# EAGLE board ampli (EAGLE 8.5.0)
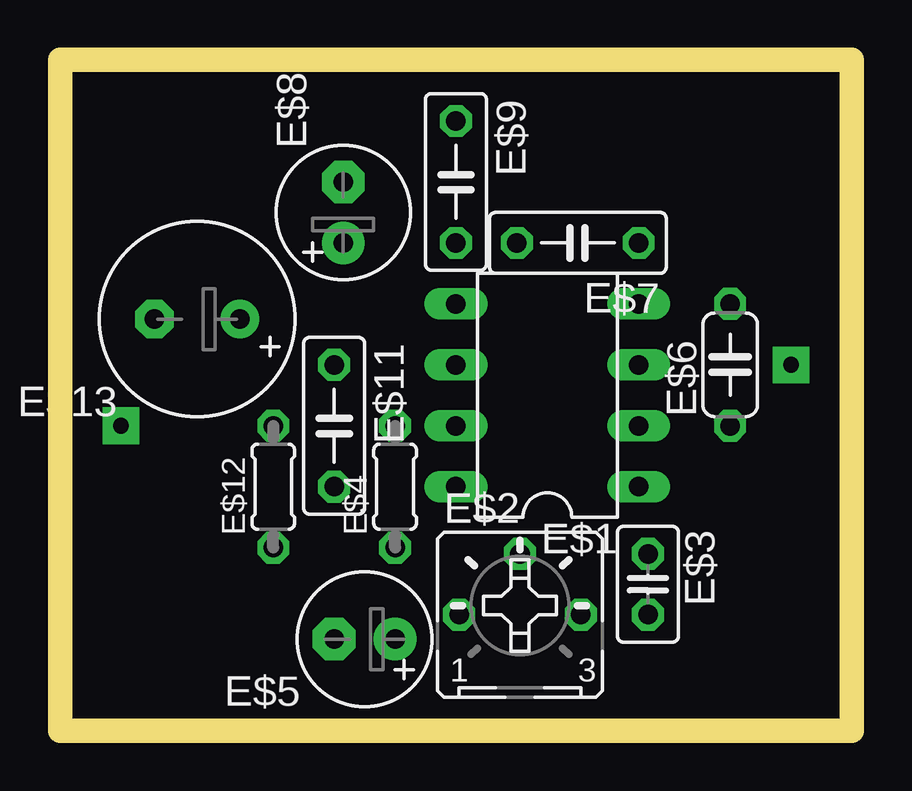
[diagram p0: board, top side]
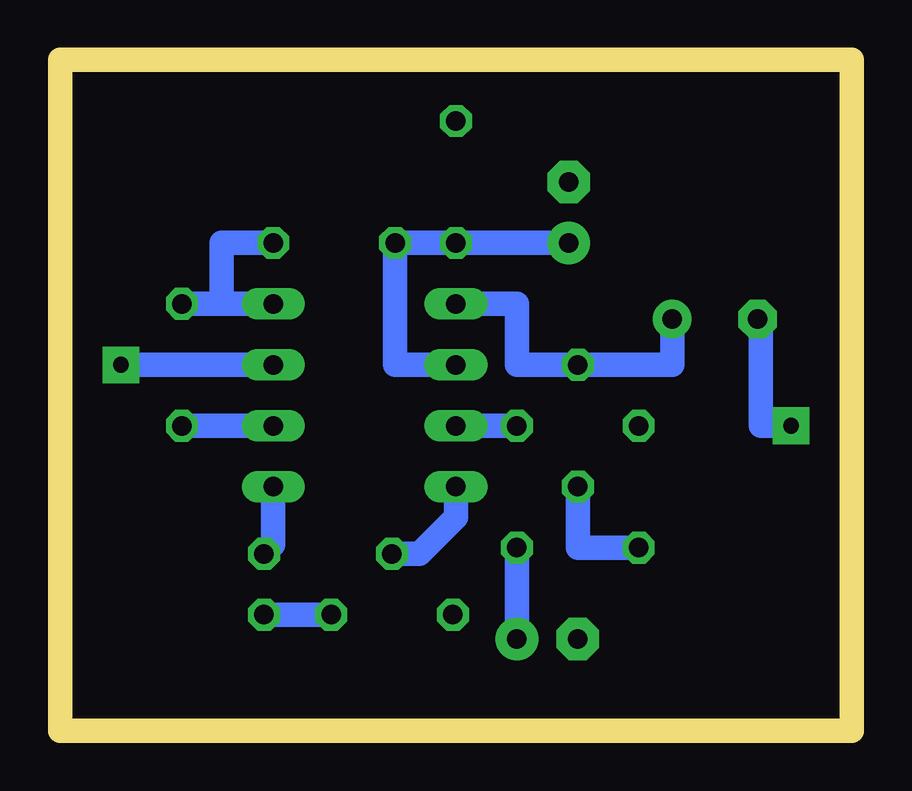
[diagram p1: board, bottom side, seen from below]

Size 33.02 x 27.94 mm. Coordinates in mm from the lower left corner, seen from the top.
Outline: 0,27.94 0,0 33.02,0 33.02,27.94 0,27.94
Copper layers (1*16): Top 0.035mm / dielectric 1.5mm / Bottom 0.035mm
Design rules "default": minimum track width 6mil, minimum drill 0.35mm, track to track 6mil, track to pad 6mil, pad to pad 6mil, via to via 6mil, smd to smd 6mil, copper to edge 40mil, drill to drill 6mil, minimum pad ring 10mil, minimum via ring 8mil, stop-mask expansion 4mil, vias tented up to drill 0mil, thermal gap 10mil

## Footprints (pad centres in the part's own frame; a part is rotated, then mirrored left to right if it is on the bottom)
DIL08 = drill 0.813 long: 1 -3.81,-3.81; 2 -1.27,-3.81; 3 1.27,-3.81; 4 3.81,-3.81; 5 3.81,3.81; 6 1.27,3.81; 7 -1.27,3.81; 8 -3.81,3.81
B25P = drill 0.813 octagon: A -2.54,0; E 2.54,0; S 0,2.54
C025-025X050 = drill 0.813 octagon: 1 -1.27,0; 2 1.27,0
0204/5 = drill 0.813 octagon: 1 -2.54,0; 2 2.54,0
E2,5-6 = drill 0.813 pad 1.778: + -1.27,0 | drill 0.813 pad 1.778 octagon: - 1.27,0
C050-024X044 = drill 0.813 octagon: 1 -2.54,0; 2 2.54,0
C050-025X075 = drill 0.813 octagon: 1 -2.54,0; 2 2.54,0
E3,5-8 = drill 0.813 pad 1.6: + -1.778,0 | drill 0.813 pad 1.6 octagon: - 1.778,0

## Placement (x,y rotation side)
E$1  [DIL08]  20.32,13.97 90 top
E$2  [B25P]  19.18,4.83 0 top
E$3  [C025-025X050]  24.51,6.1 270 top
E$4  [0204/5]  13.97,10.16 90 top
E$5  [E2,5-6]  12.7,3.81 180 top
E$6  [C050-024X044]  27.94,15.24 90 top
E$7  [C050-025X075]  21.59,20.32 180 top
E$8  [E2,5-6]  11.81,21.59 90 top
E$9  [C050-025X075]  16.51,22.86 270 top
E$11  [C050-025X075]  11.43,12.7 270 top
E$12  [0204/5]  8.89,10.16 90 top
E$13  [E3,5-8]  5.71,17.14 180 top

## Library data of the parts
E$1 = 40xx
E$2 = pot
E$3 E$4 E$6 E$7 E$9 E$11 E$12 = BeagleBone_Black_Wireless
E$5 E$8 E$13 = BeagleBone_Blue_R3

## Nets
S$1: E$1.8 E$2.S
S$2: E$2.E E$3.2
S$3: E$1.1 E$3.1
S$4: E$1.7 E$4.2
S$5: E$4.1 E$5.+
S$6: E$1.4 E$6.2 E$7.1
S$7: E$1.2 E$6.1
S$8: E$1.3
S$9: E$11.2 E$12.1
S$10: E$1.5 E$11.1 E$13.+
S$11: E$1.6 E$7.2 E$8.+ E$9.2

## Tracks (layer width: path | path; a pad name or v marks a point on that pad's centre or on a via)
S$1
  Bottom 1.016: E$1.8 16.51,8.89 18.03,7.37 E$2.S
S$2
  Bottom 1.016: E$2.E E$3.2
S$3
  Bottom 1.016: E$1.1 24.13,7.75 E$3.1
S$4
  Bottom 1.016: E$4.2 E$1.7
S$5
  Bottom 1.016: E$5.+ E$4.1
S$6
  Bottom 1.016: E$1.4 26.29,17.78 | 26.29,17.78 E$6.2 | E$7.1 26.29,20.32 26.29,17.78
S$7
  Bottom 1.016: E$1.2 E$6.1
S$8  (via drill 0.65 pad 1.52)
  Bottom 1.016: E$1.3 v30.48,15.24
S$9
  Bottom 1.016: E$12.1 11.43,7.62 E$11.2
S$10
  Bottom 1.016: E$1.5 13.97,17.78 13.97,15.24 E$11.1 7.49,15.24 E$13.+
S$11
  Bottom 1.016: E$8.+ E$9.2 E$7.2 19.05,15.24 E$1.6
S$12  (via drill 0.65 pad 1.52)
  Bottom 1.016: 3.81,16.51 3.81,12.7 v2.54,12.7